# Altium PCB Dual PMT Controller - Light Interlock.PcbDoc
Units mm, origin at the board's own origin, x right, y up, seen from the top; angles counter-clockwise.
Board outline 38 x 30 mm, 4 copper layers (Top Layer, Mid Layer 1, Mid Layer 2, Bottom Layer), stack 1.57 mm thick; 8 components, 5 nets, 45 pads, 6 vias.
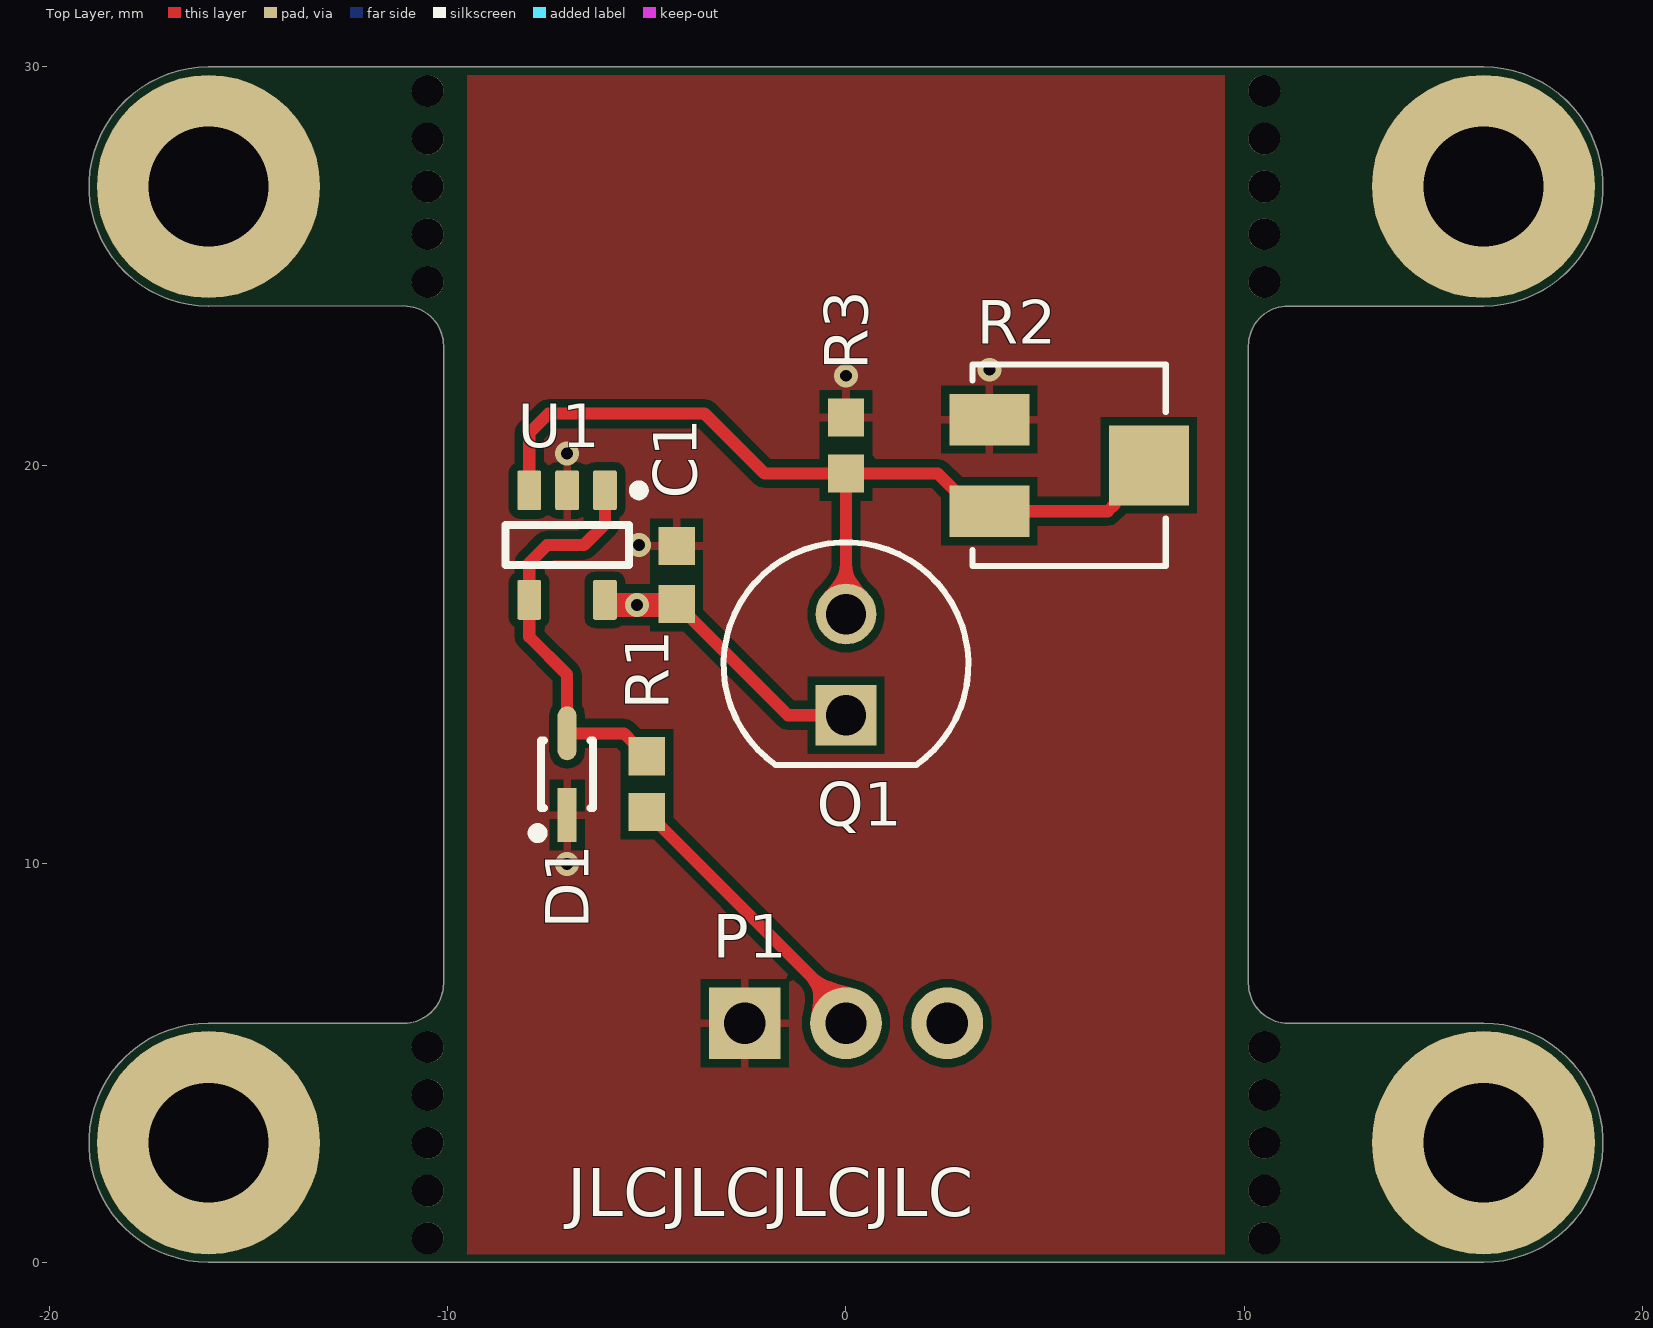
[diagram p0: Top Layer view]
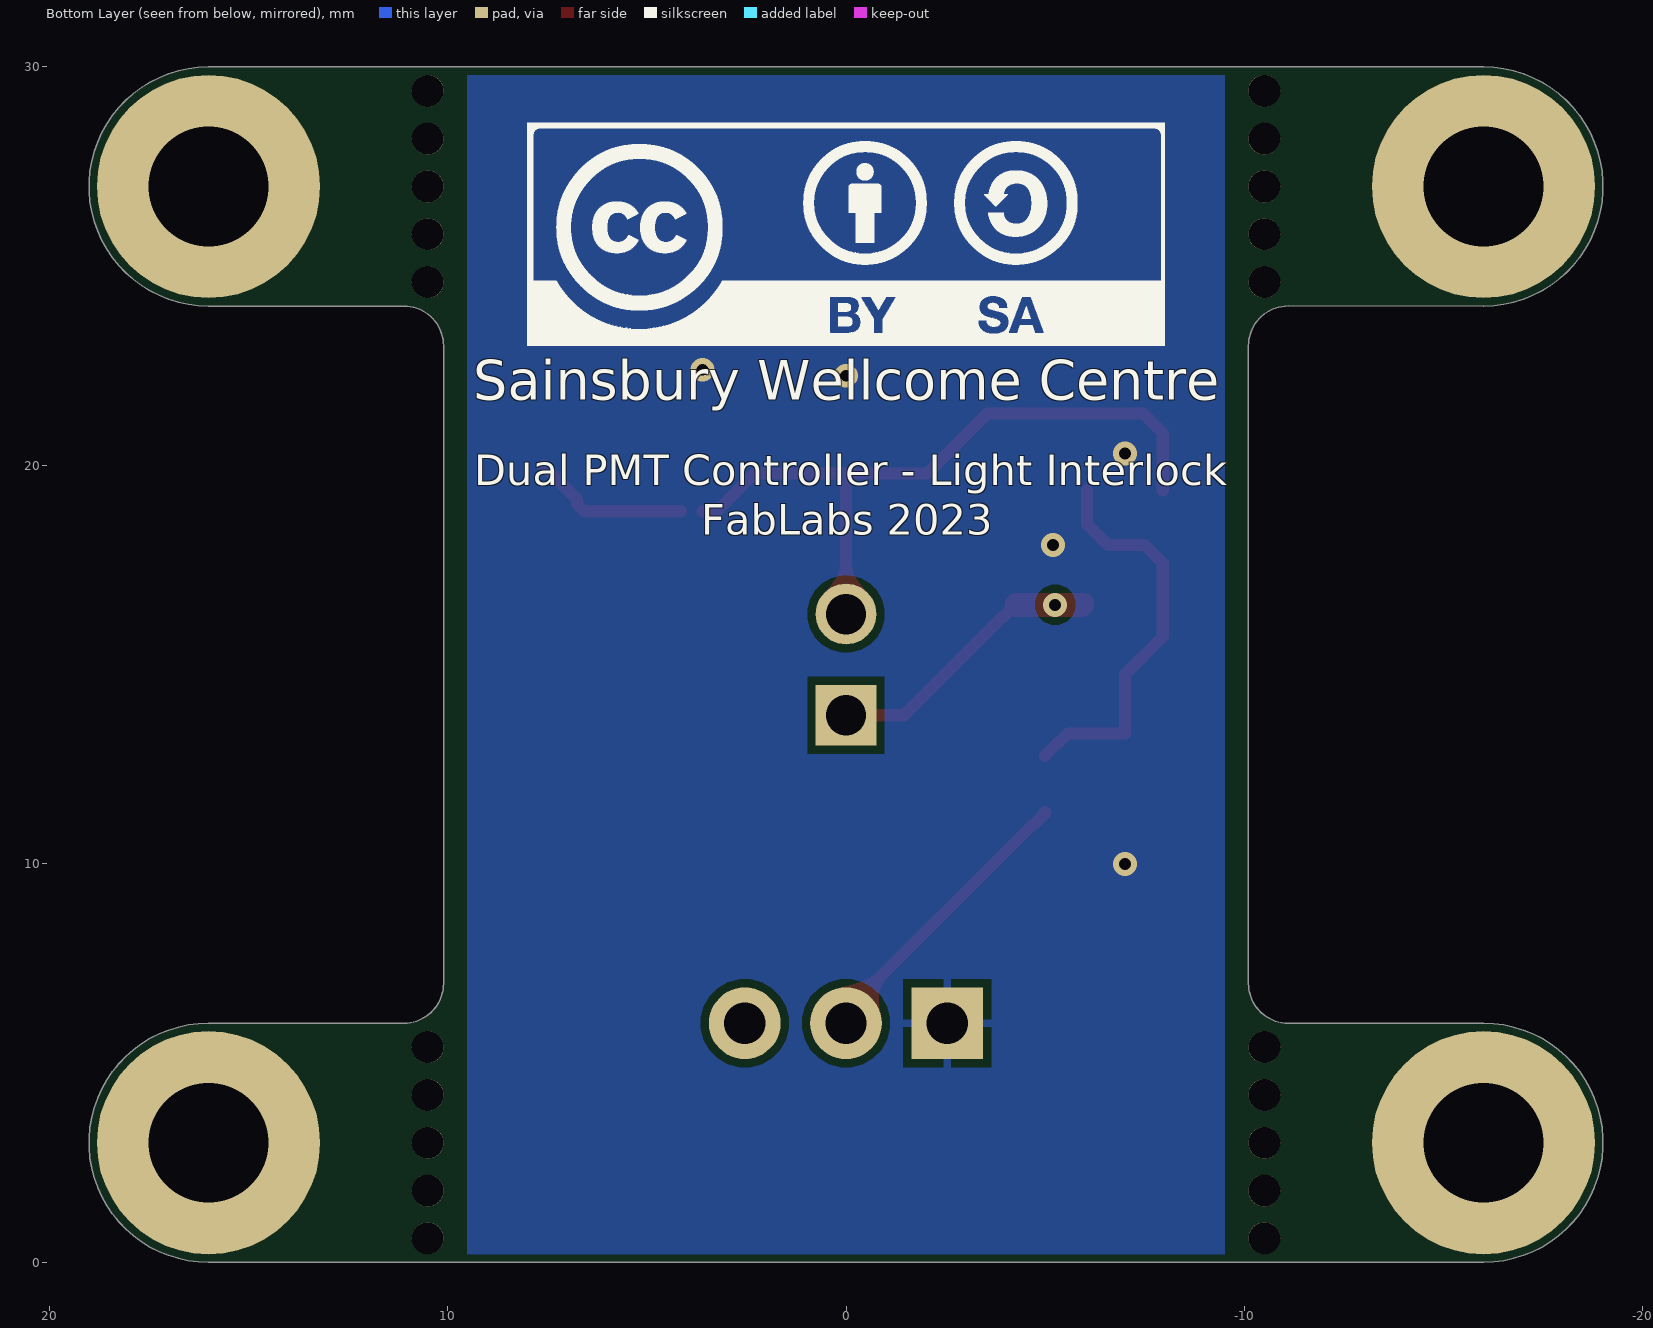
[diagram p1: Bottom Layer view, seen from below]
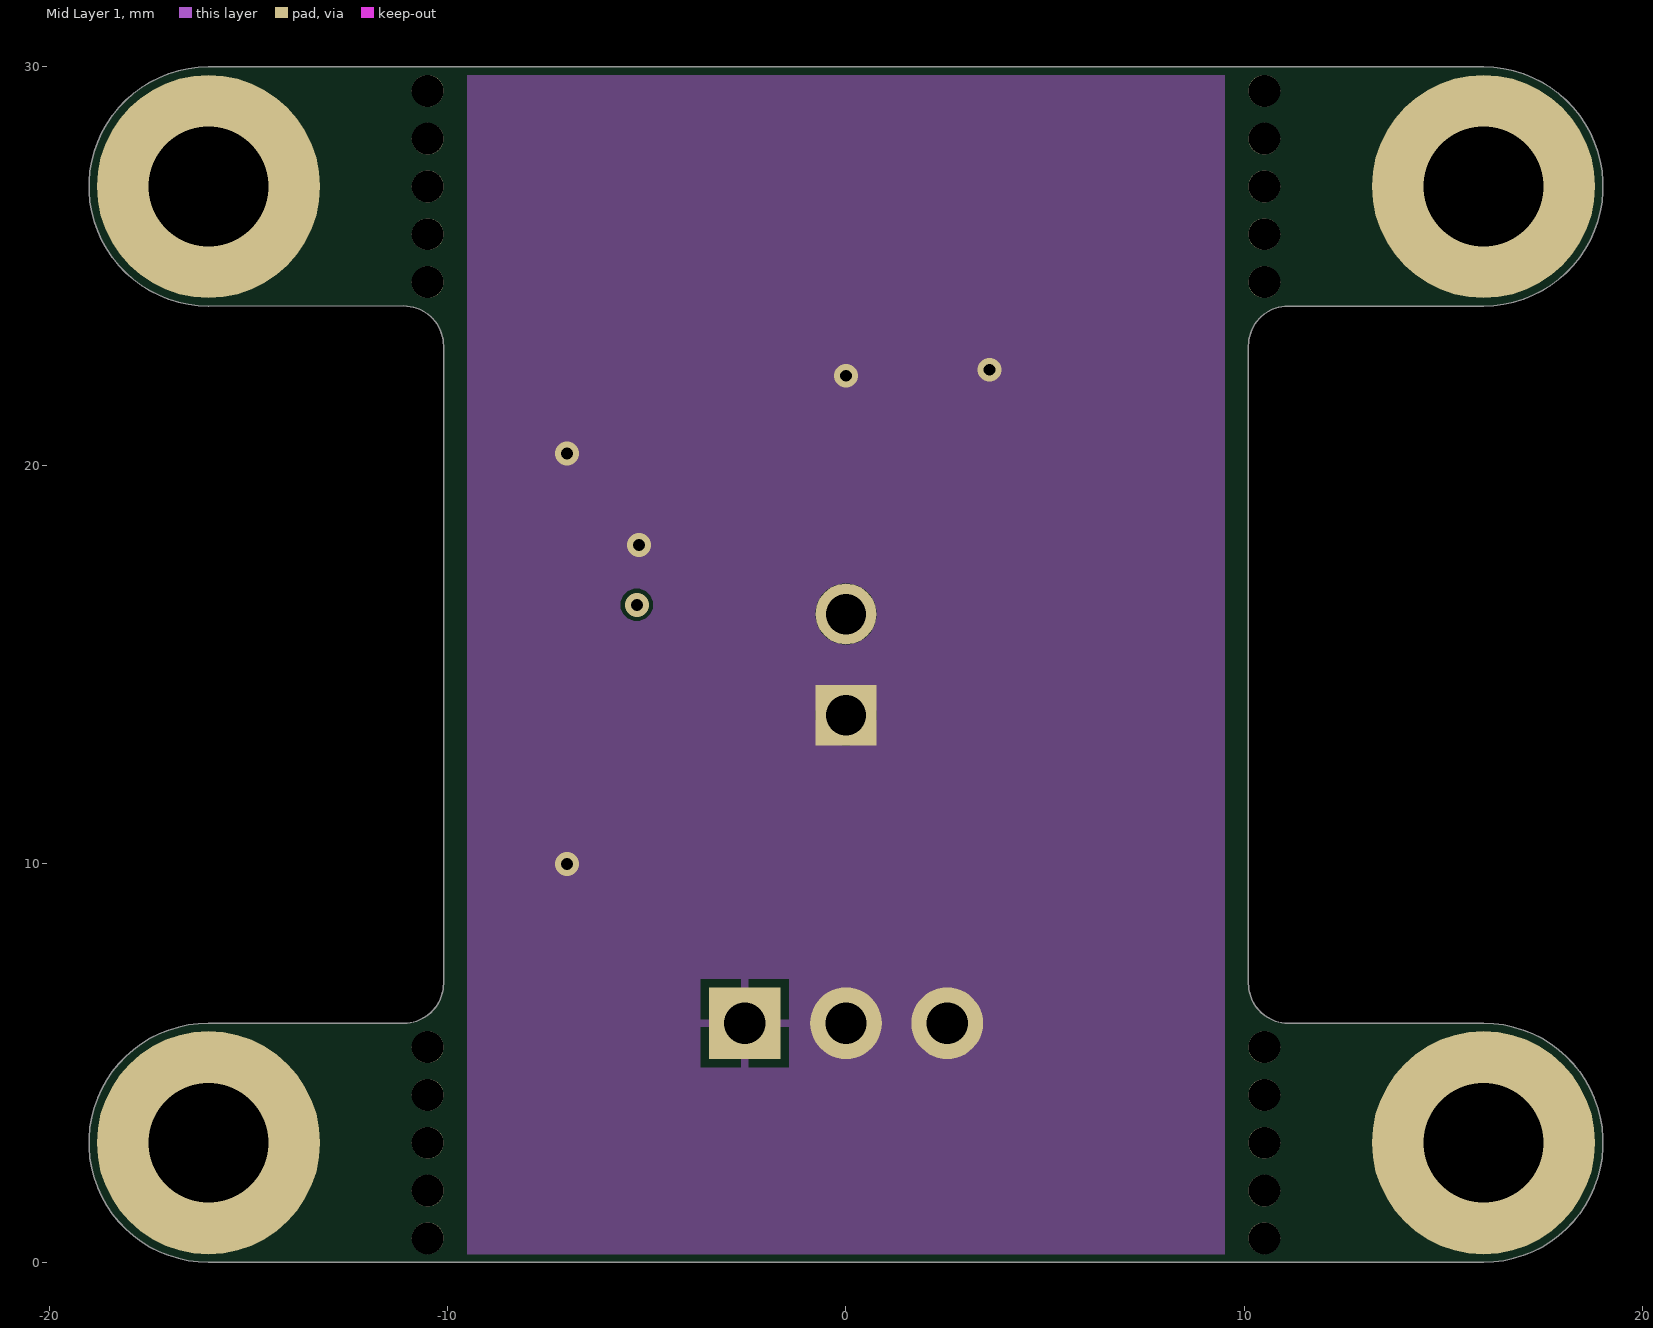
[diagram p2: Mid Layer 1]
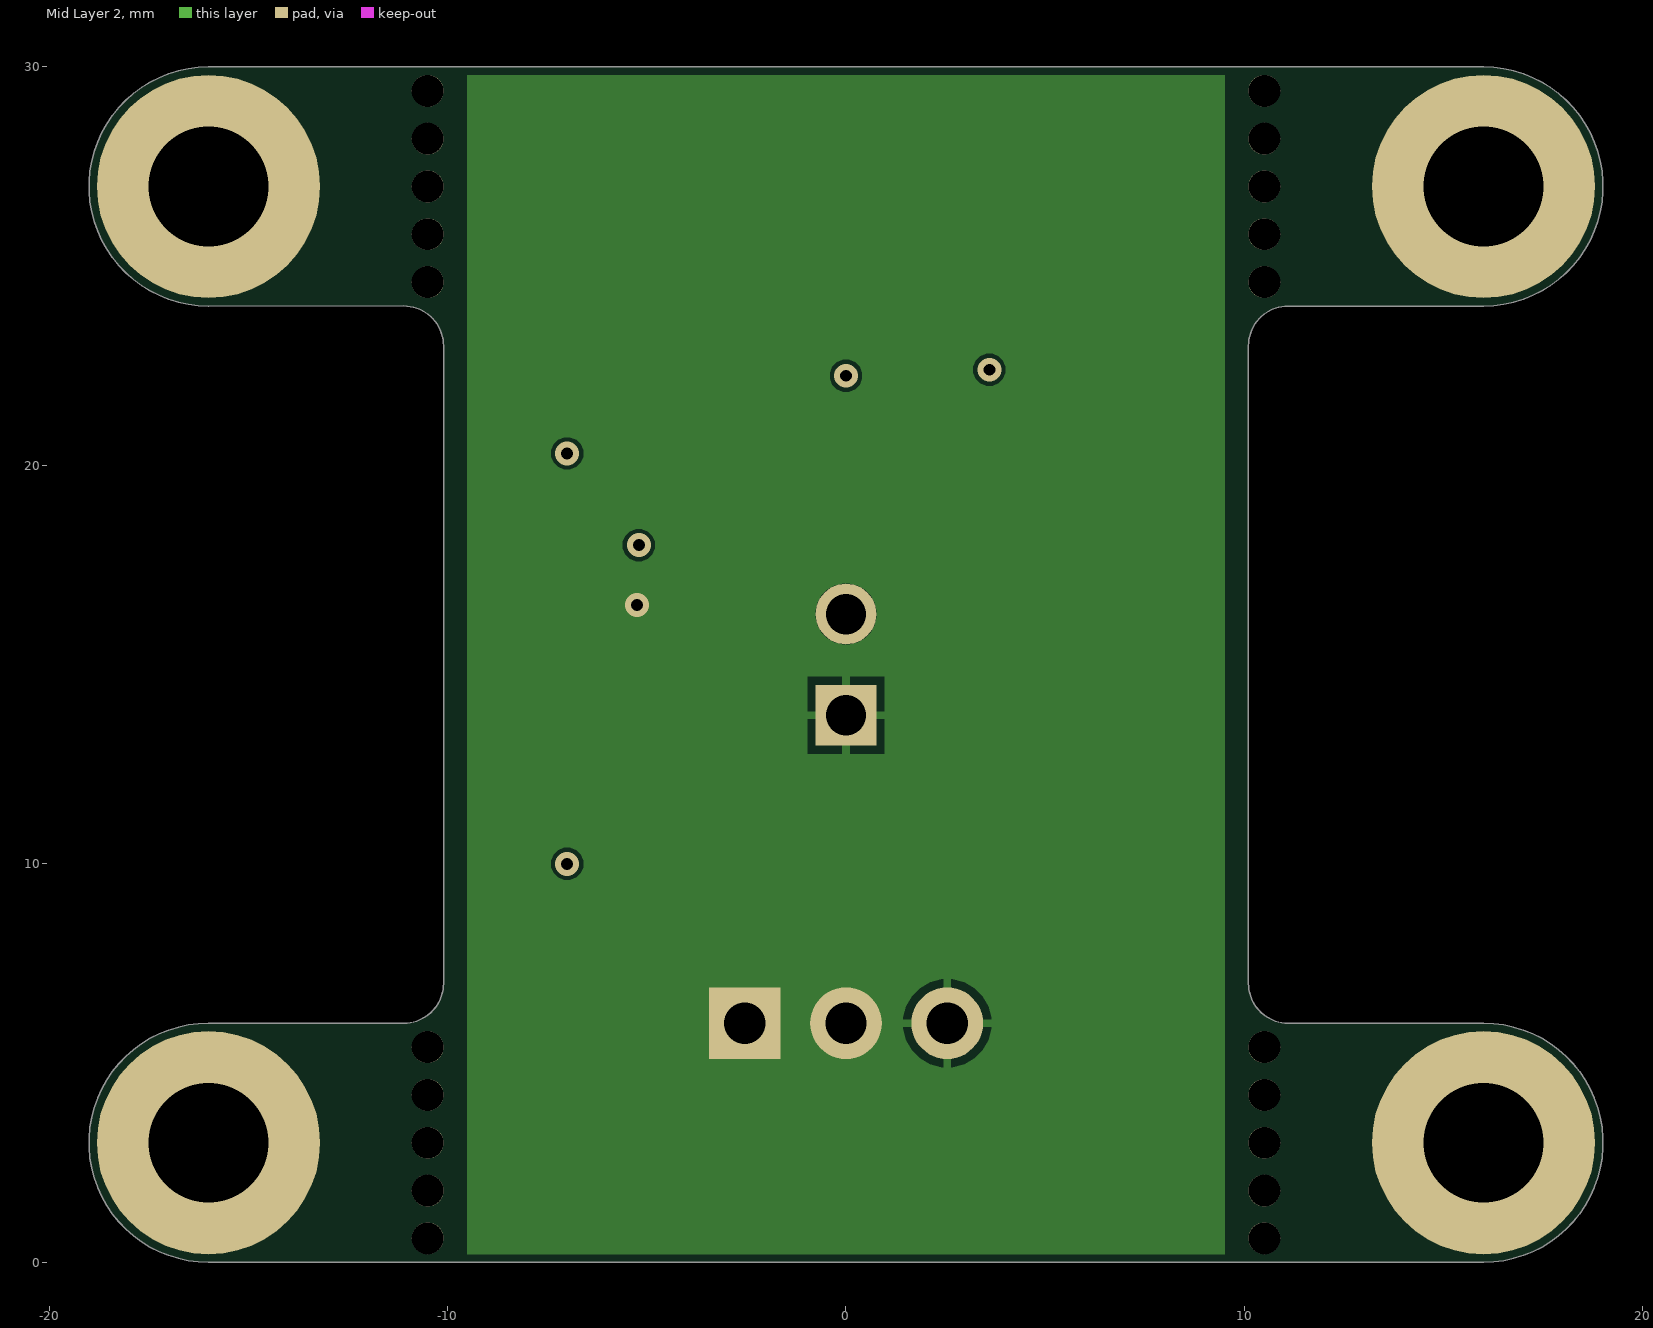
[diagram p3: Mid Layer 2]
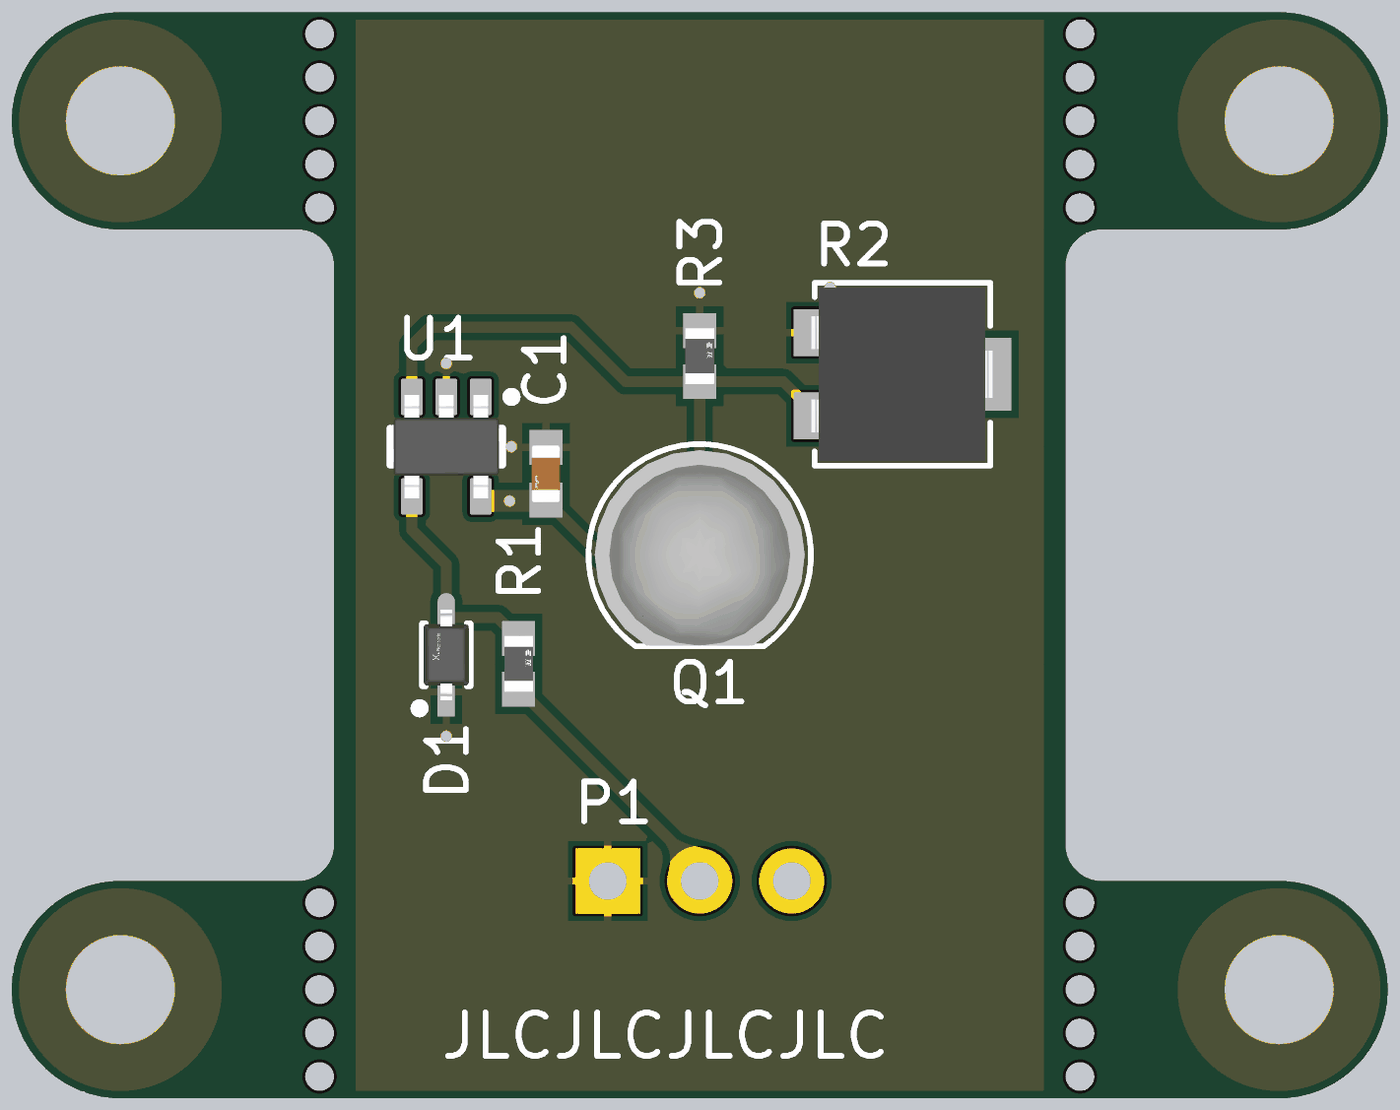
[diagram p4: 3D render of the assembled board from above, using the file's embedded part models]

## Layer stack, top to bottom
Top Solder: solder mask 0.0127, Solder Resist, Dk 3.8
Top Layer: signal copper 0.035
Dielectric 1: prepreg 0.2, 7628, Dk 4.6
Mid Layer 1: signal copper 0.0175
Core: core 1.065, FR-4, Dk 4.5
Mid Layer 2: signal copper 0.0175
Dielectric 2: prepreg 0.2, 7628, Dk 4.6
Bottom Layer: signal copper 0.035
Bottom Solder: solder mask 0.0127, Solder Resist, Dk 3.8

## Board outline
-16,0 12,0 16,0 ccw(c16,3) 16,6 11.1,5.999 cw(c11.1,7) 10.1,7.003 10.1,22.997 cw(c11.1,23) 11.1,24 16,24 ccw(c16,27) 16,30 12,30 -16,30 ccw(c-16,27) -16,24 -11.1,24.001 cw(c-11.1,23) -10.099,22.997 -10.1,7.003 cw(c-11.1,7) -11.1,6 -16,6 ccw(c-16,3)

## Design rules (kind name [scope] priority, off if disabled: settings)
BoardOutlineClearance [All] p1: gap=0.2 ignorepadtopadclearanceinfootprint=FALSE
Clearance [All] p1: gap=0.203 ignorepadtopadclearanceinfootprint=TRUE except(0.127: Arc-Via Track-Via SMDPad-Via THPad-Via Via-Via; 0.25: Arc-Hole Track-Hole SMDPad-Hole THPad-Hole Via-Hole Fill-Hole Poly-Hole Region-Hole Text-Hole)
ComponentClearance [All] p1: gap=0.102 collisioncheckmode=3 verticalgap=0.102 showdistances=TRUE
DiffPairsRouting [All] p1: maxlimit=0.102 minlimit=0.102 mostfreqgap=0.102 toplayer_minwidth=0.102 toplayer_maxwidth=1816.048 toplayer_prefwidth=0.102 midlayer1_minwidth=0.102 midlayer1_maxwidth=1816.048 midlayer1_prefwidth=0.102 midlayer2_minwidth=0.102 midlayer2_maxwidth=1816.048 midlayer2_prefwidth=0.102 bottomlayer_minwidth=0.102 bottomlayer_maxwidth=1816.048 bottomlayer_prefwidth=0.102 maxuncoupledlength=12.7
Height [All] p1: minheight=0 maxheight=1816.048 prefheight=12.7
HoleSize [All] p1: absolutevalues=TRUE maxlimit=6.3 minlimit=0.2 maxpercent=80.000 minpercent=20.000
HoleToHoleClearance [All] p1: gap=0.25 allowstackedmicrovias=FALSE
MinimumAnnularRing [All] p1: minimumring=0.076
MinimumSolderMaskSliver [All] p1: minsoldermaskwidth=0
PlaneClearance [All] p1: clearance=0.203
PlaneConnect PlaneConnectPowerPads [InPadClass('PowerPads')] p1: planeconnectstyle=Direct reliefexpansion=0.508 reliefentries=4 reliefconductorwidth=0.254 reliefairgap=0.254
PlaneConnect [All] p2: pad.planeconnectstyle=Relief pad.reliefexpansion=0.3 pad.reliefentries=4 pad.reliefconductorwidth=0.203 pad.reliefairgap=0.203 via.planeconnectstyle=Direct via.reliefexpansion=0.3 via.reliefentries=4 via.reliefconductorwidth=0.127 via.reliefairgap=0.127
PolygonConnect PolygonConnectPowerPads [All vs (InPadClass('PowerPads'))] p1: connectstyle=Direct reliefconductorwidth=0.254 reliefentries=4 polygonreliefangle="90 Angle" airgapwidth=0.254
PolygonConnect [All] p2: thpad.connectstyle=Relief thpad.reliefconductorwidth=0.203 thpad.reliefentries=4 thpad.polygonreliefangle="90 Angle" thpad.airgapwidth=0.203 smdpad.connectstyle=Relief smdpad.reliefconductorwidth=0.203 smdpad.reliefentries=4 smdpad.polygonreliefangle="90 Angle" smdpad.airgapwidth=0.203 via.connectstyle=Direct via.reliefconductorwidth=0.127 via.reliefentries=4 via.polygonreliefangle="90 Angle" via.airgapwidth=0.127
RoutingVias [All] p1: holewidth=0.2 width=0.45 viastyle="Through Hole" minholewidth=0.2 minwidth=0.45 maxholewidth=6.3 maxwidth=6.55
SilkToSilkClearance [All] p1: silktosilkclearance=0
SilkToSolderMaskClearance [IsPad] p1: minsilkscreentomaskgap=0.102 clearancetoexposedcopper=TRUE
SolderMaskExpansion [All] p1: expansion=0.075 istentingtop=FALSE
Width [All] p1: maxlimit=1816.048 minlimit=0.203 preferedwidth=0.254
20 further rules are at their usual default settings.

## Components (designator, comment, footprint, x,y, rotation, side; value= is the part's Value field where it differs from the comment)
C1 "C0603-100nF-100V-10%-X7R" FP-GRM188-0_1-e0_2_0_5-IPC_B -4.25,17.25 r270 top value=100nF
D1 "PESD5V0S1BA,115" FP-SOD323-CA-IPC_B -7,12.25 r90 top
P1 "Header-103" Header-103 -2.54,6 r0 top
Q1 "TEPT5700" LED_TEPT5700_VIS 0,13.73 r90 top
R1 "R0603-150R-1/16W-0.1%" FP-CPF0603-IPC_B -5,12 r270 top value=150
R2 "SM-42TA504" SM-42TAxxx_NDC 5.6,20 r0 top value=500k
R3 "R0603-240k-1/16W-0.1%" FP-CPF0603-IPC_B 0,20.5 r270 top value=240k
U1 "OPA353NA/250" DBV0005A_N -7,18 r270 top

## Footprints (in the part's own frame and the unit in brackets; to place one, negate y for a bottom-side part, rotate by r counter-clockwise, add the part's x,y. Pads: shape width x height; smd on the part's side, far side on the other; paste and mask are expansions set on the pad)
DBV0005A_N [mm] "SOT23, 5-Leads, Body 3.05x1.75mm, Pitch 0.95mm, IPC Medium Density"
  rrect17% 1x0.6 smd: 1(-1.375,0.95) 2(-1.375,0) 3(-1.375,-0.95) 4(1.375,-0.95) 5(1.375,0.95)
  silkscreen extent -1.5,-1.55 0.5,1.93, body extent -1.42,-1.46 1.42,1.46, height 1.08
FP-CPF0603-IPC_B [mm]
  rect 0.958x0.912 smd paste+0 mask+0: 1(-0.702,0) 2(0.702,0)
  body extent -1.43,-0.71 1.43,0.71, height 0.25
FP-GRM188-0_1-e0_2_0_5-IPC_B [mm]
  rect 0.959x0.912 smd paste+0 mask+0: 1(-0.727,0) 2(0.727,0)
  body extent -1.46,-0.71 1.46,0.71, height 0.25
FP-SOD323-CA-IPC_B [mm]
  rect 1.355x0.476 smd paste+0 mask+0: 1(-1.025,0)
  rrect100% 1.355x0.476 smd paste+0 mask+0: 2(1.025,0)
  silkscreen extent -1.6,-0.65 0.85,0.86, body extent -1.95,-0.87 1.95,0.87, height 0.25
Header-103 [mm]
  rect 1.8x1.8 hole 1.04: 1(0,0)
  round 1.8 hole 1.04: 2(2.54,0) 3(5.08,0)
LED_TEPT5700_VIS [mil] "VISHAY - Leaded T-1 3/4 - 5mm"
  rect 60x60 hole 40: 1(0,0)
  round 60 hole 40: 2(100,0)
  silkscreen extent -49,-121 171,121, body extent -48,-114 164,114, height 457
SM-42TAxxx_NDC [mil] "Trimpot, Multi Turn, RuO2 Cermet, Side Adjust, Surface Mount, 11 Turns"
  rect 79x51 smd: 1(-78.74,-45.28) 3(-78.74,45.28)
  rect 79x79 smd paste+0 mask+0: 2(78.74,0)
  silkscreen extent -96,-100 96,100, body extent -99,-94 98,94, height 146

## Part data
C1: library part CMP-611-0027-19, "0.1µF ±10% 100V Ceramic Capacitor X7R 0603 (1608 Metric)", Capacitance=100nF, Capacitor Type=Ceramic, Case Code (Imperial)=0603, Case Code (Metric)=1608, Dielectric=X7R, Max Operating Temperature=125°C, Min Operating Temperature=-55°C, Package Quantity=1, Tolerance=10%, Voltage=100V, Case/Package=0603, Construction=Flat, Depth=0.8mm, Height=0.8mm, Lead Free="Lead Free", Length=1.6mm, Material=Ceramic, Mount="Surface Mount", Packaging="Tape and Reel", Pick&PlaceFootprint=0603_CAP, Radiation Hardening=No, REACH SVHC="No SVHC", RoHS=Yes, RoHS Compliant=Yes, Series=GRM, Size=0.8mm, Termination=SMD/SMT, Thickness=0.035inch, Voltage Rating=100V, Voltage Rating (DC)=100V, Weight=0.000222oz, Width=0.8mm
D1: library part CMP-820-0001-1, "Trans Voltage Suppressor Diode, 130W, 5V V(RWM), Bidirectional, 1 Element, Silicon", Max Breakdown Voltage=9.5V, Max Operating Temperature=150°C, Min Breakdown Voltage=5.5V, Non-rep Peak Rev Power Dis-Max=130W, Package Body Material=Plastic, Package Shape=Rectangular, Package Style="SMALL OUTLINEMeter", Peak Reflow Temperature (Cel)=260°C, Rep Pk Reverse Voltage-Max=5V, Time @ Peak Reflow Temperature-Max (s)=30s, Diode Element Material=SILICON, Diode Type="TRANS VOLTAGE SUPPRESSOR", JESD-30 Code=R-PDSO-G2, JESD-609 Code=e3, Moisture Sensitivity Level=1, Mount="Surface Mount", Number of Elements=1, Number of Pins=2, PartNumber=PESD5V0S1BA,115, Pick&PlaceFootprint=SOD323, Polarity=Bidirectional, REACH SVHC=Yes, Reference Standard=IEC-60134, RoHS Compliant=Yes, Surface Mount=Yes, Technology=AVALANCHE, Terminal Finish=Tin, Terminal Form="Gull Wing", Terminal Position=DUAL
P1: library part CMP-370-0045-1, "0.1\" spaced holes to solder wires into", Mount="Surface Mount", PartNumber=Header-103, Pitch="0.1\""
Q1: library part CMP-540-0000-1, "Ambient Light Sensor Phototransistor Chip Silicon 570nm 2-Pin T-1 3/4", Case/Package=Radial, Collector Emitter Breakdown Voltage=6V, Dark Current=50nA, Max Collector Current=20mA, Max Operating Temperature=85°C, Max Power Dissipation=100mW, Min Operating Temperature=-40°C, Operating Supply Voltage=5V, Package Quantity=4000, Collector Emitter Voltage (VCEO)=6V, Height=5mm, Lead Free="Lead Free", Length=5.7mm, Lens Style=Flat, Mount="Through Hole", Number of Channels=1, Number of Elements=1, Number of Pins=2, Output Type=Analog, Packaging=Bulk, Polarity=NPN, Power Consumption=100mW, Power Dissipation=100mW, Radiation Hardening=No, REACH SVHC=Unknown, RoHS Compliant=Yes, Series=-, Viewing Angle=50°, Wavelength=570nm, Width=5.7mm
R1: library part CMP-633-0078-2, "Surface Mount Resistor 150 Ohm 1/16 W 0.1% 0603 (1608 Metric)", Case Code (Imperial)=0603, Case Code (Metric)=1608, Max Operating Temperature=155°C, Max Power Dissipation="62.5 mW", Min Operating Temperature=-55°C, Number of Resistors=1, Power Rating=62.5mW, Resistance=150, Resistance Tolerance=0.1%, Resistor Type="FIXED RESISTOR", Temperature Coefficient=25ppm/°C, Voltage Rating=50V, Case/Package=0603, Composition="Thin Film", Construction=Chip, ELV=Compliant, Height=0.45mm, Length=1.6mm, Mount="Surface Mount", Number of Pins=2, Number of Terminations=2, Packaging="Tape and Reel", Pick&PlaceFootprint=R0603, REACH SVHC=Yes, RoHS=Yes, RoHS Compliant=Yes, Series=CPF, Size Code=0603, Technology="THIN FILM", Termination=Wraparound, Tolerance=0.1%, Voltage Rating (DC)=50V, Weight=7.1E-05oz, Width=0.8mm
R2: library part CMP-632-0001-2, "Trimmer, Cermet, 0.25W, 500k ohm, 300V, 10% +/-Tol, 100ppm/Cel, 11 Turn(s), 1918", Case/Package=SM-42TA, Power Rating=250mW, Resistance=500k, Tolerance=10%, Voltage Rating=300V, Mount=SMD, Number of Turns=11, PartNumber=SM-42TA504, Pick&PlaceFootprint=SM-42TA, RoHS=Yes
R3: library part CMP-633-0073-14, "Surface Mount Resistor 240k Ohm 1/16 W 0.1% 0603 (1608 Metric)", Case Code (Imperial)=0603, Case Code (Metric)=1608, Max Operating Temperature=155°C, Max Power Dissipation="62.5 mW", Min Operating Temperature=-55°C, Number of Resistors=1, Power Rating=62.5mW, Resistance=240k, Resistance Tolerance=0.1%, Resistor Type="Thin Film", Temperature Coefficient=25ppm/°C, Voltage Rating=50V, Case/Package=0603, Composition="Thin Film", ELV=Compliant, Height=0.45mm, Length=1.6mm, Mount="Surface Mount", Number of Pins=2, Number of Terminations=2, Packaging="Tape and Reel", Pick&PlaceFootprint=R0603, REACH SVHC="No SVHC", RoHS=Yes, RoHS Compliant=Yes, Series=CPF, Size Code=0603, Technology="Thin Film", Termination=Solder, Tolerance=0.1%, Voltage Rating (DC)=50V, Weight=7.1E-05oz, Width=0.8mm
U1: library part CMP-941-0005-3, "Operational Amplifier, 1 Func, 8000uV Offset-Max, CMOS, PDSO5", Component Name=OPA353NA/250, PartNumber=OPA353NA/250, Pick&PlaceFootprint=SOT-23-5

## Free pads (board coordinates)
  round 5.6 hole 3 mask-1.524: 1(-16,3) 1(-16,27) 1(16,3) 1(16,27)
  round 0.8 hole 0.8 unplated: 2(-10.5,5.4) 2(-10.5,24.6) 2(10.5,5.4) 2(10.5,24.6) 3(-10.5,4.2) 3(-10.5,25.8) 3(10.5,4.2) 3(10.5,25.8) 4(-10.5,3) 4(-10.5,27) 4(10.5,3) 4(10.5,27) 5(-10.5,1.8) 5(-10.5,28.2) 5(10.5,1.8) 5(10.5,28.2) 6(-10.5,0.6) 6(-10.5,29.4) 6(10.5,0.6) 6(10.5,29.4)

## Via types
v1: diameter 0.6, hole 0.3, Top Layer to Bottom Layer, tented both sides, 6 vias

## Nets (pads, with @x,y where several pads share a name; then routed paths per layer and width w, separated by ;. In a path a pad name is that pad's centre, name@x,y a point inside that pad or via, vN(x,y) a via of type N, cw(c..) or ccw(c..) an arc to the next point about the centre after c; other vN are vias at no path point)
3V3: C1.2 P1.3 Q1.1 U1.5 | length 7.3
  Top Layer w0.305: U1.5 U1.5@-5.925,16.5 ; C1.2@-4.273,16.5 C1.2 -4.25,16.5 -3.946,16.196 -3.923,16.196 -1.457,13.73 Q1.1
  Top Layer w0.6: U1.5@-5.925,16.5 v1(-5.25,16.5) C1.2@-4.273,16.5
GND: C1.1 D1.1 P1.1 R2.3 R3.1 U1.2
  other v1: -7,10 -5.2,18 -7,20.3 0,22.25 3.6,22.4
NetD1_2: D1.2 R1.1 U1.1 U1.4 | length 10.1
  Top Layer w0.305: U1.1 -6.05,18.525 -6.575,18 -7.5,18 -7.95,17.55 -7.95,15.7 -7,14.75 D1.2 -5.573,13.275 -5.327,13.029 -5.304,13.029 -5,12.725 R1.1
NetP1_2: P1.2 R1.2 | length 7.4
  Top Layer w0.305: R1.2 -5,11.275 -4.696,10.971 -4.673,10.971 0,6.298 P1.2
NetQ1_2: Q1.2 R2.1 R2.2 R3.2 U1.3 | length 21.7
  Top Layer w0.305: U1.3 -7.95,20.812 -7.462,21.3 -3.55,21.3 -2.048,19.798 R3.2 ; Q1.2 R3.2 ; R2.1 3.244,18.85 2.749,19.345 2.749,19.351 2.302,19.798 R3.2 ; R2.1@4.144,18.85 4.5,18.85 6.571,18.85 6.749,19.029 6.749,19.149 R2.2

## Polygon pours and split planes (outlines as drawn)
GND on Top Layer "GND_L01_P000" (solid, pour order 0): -9.5,0 9.5,0 9.5,30 -9.5,30
GND on Mid Layer 1 "GND_L02_P001" (solid, pour order 1): -9.5,0 9.5,0 9.5,30 -9.5,30
3V3 on Mid Layer 2 "3V3_L03_P002" (solid, pour order 2): -9.5,0 9.5,0 9.5,30 -9.5,30
GND on Bottom Layer "GND_L04_P003" (solid, pour order 3): -9.5,0 9.5,0 9.5,30 -9.5,30

## Silkscreen, mask and mechanical layers (free items; w line width, h text height)
Top Overlay:
  text "JLCJLCJLCJLC" at -6.998,1.16 h1.2
Bottom Overlay:
  drawing of 12 lines, arcs and shapes, not listed
  text "Sainsbury Wellcome Centre" at 9.354,21.321 h1.7
  text "Dual PMT Controller - Light Interlock" at 9.334,19.245 h1.3
  text "FabLabs 2023" at 3.634,18.014 h1.3
Mechanical 1:
  lines w0.1: -16,0 cw(c-16,3) -16,6 -11.1,5.999 ccw(c-11.1,7) -10.1,7.003 -10.099,22.997 ccw(c-11.1,23) -11.1,24 -16,24 cw(c-16,27) -16,30 -12,30 12,30 16,30 cw(c16,27) 16,24 11.1,24.001 ccw(c11.1,23) 10.1,22.997 10.1,7.003 ccw(c11.1,7) 11.1,6 16,6 cw(c16,3) 16,0 12,0 -12,0 -16,0
Layer Stackup:
  drawing of 295 lines, arcs and shapes, not listed
  text "Layer" at 1.968,66.48 h1.52
  text "Name" at 12.38,66.48 h1.52
  text "Material" at 35.996,66.48 h1.52
  text "Thickness" at 57.834,66.48 h1.52
  text "Constant" at 74.34,66.48 h1.52
  text "Board Layer Stack" at 88.814,66.48 h1.52
  text "Top Overlay" at 12.38,63.432 h1.52
  text "Top Solder" at 12.38,60.384 h1.52
  text "Solder Resist" at 35.996,60.384 h1.52
  text "0.013mm" at 57.834,60.384 h1.52
  text "3.8" at 74.34,60.384 h1.52
  text "1" at 1.968,57.336 h1.52
  text "Top Layer" at 12.38,57.336 h1.52
  text "0.035mm" at 57.834,57.336 h1.52
  text "Dielectric 1" at 12.38,54.288 h1.52
  text "7628" at 35.996,54.288 h1.52
  text "0.200mm" at 57.834,54.288 h1.52
  text "4.6" at 74.34,54.288 h1.52
  text "2" at 1.968,51.24 h1.52
  text "Mid Layer 1" at 12.38,51.24 h1.52
  text "0.018mm" at 57.834,51.24 h1.52
  text "Core" at 12.38,48.192 h1.52
  text "FR-4" at 35.996,48.192 h1.52
  text "1.065mm" at 57.834,48.192 h1.52
  text "4.5" at 74.34,48.192 h1.52
  text "3" at 1.968,45.144 h1.52
  text "Mid Layer 2" at 12.38,45.144 h1.52
  text "0.018mm" at 57.834,45.144 h1.52
  text "Dielectric 2" at 12.38,42.096 h1.52
  text "7628" at 35.996,42.096 h1.52
  text "0.200mm" at 57.834,42.096 h1.52
  text "4.6" at 74.34,42.096 h1.52
  text "4" at 1.968,39.048 h1.52
  text "Bottom Layer" at 12.38,39.048 h1.52
  text "0.035mm" at 57.834,39.048 h1.52
  text "Bottom Solder" at 12.38,36 h1.52
  text "Solder Resist" at 35.996,36 h1.52
  text "0.013mm" at 57.834,36 h1.52
  text "3.8" at 74.34,36 h1.52
  text "Bottom Overlay" at 12.38,32.952 h1.52
Drill Drawing:
  circle w0.254: c32.556,9.8 r0.847
  lines w0.254: 31.709,5.144 32.556,5.567 33.403,5.144 32.979,5.99 33.403,6.837 32.556,6.413 31.709,6.837 32.133,5.99 31.709,5.144 ; 31.709,13.187 32.133,13.187 32.556,12.764 32.979,13.187 33.403,13.187 32.979,13.61 33.403,14.033 32.979,14.033 32.556,14.457 32.133,14.033 31.709,14.033 32.133,13.61 31.709,13.187 ; 31.709,18.267 33.403,18.267 32.556,16.574 31.709,18.267 ; 31.709,20.384 33.403,20.384 33.403,22.077 31.709,22.077 31.709,20.384
  lines w0.381: 30.191,4.001 315.708,4.001 ; 30.191,23.051 315.708,23.051 ; 44.183,0.191 44.183,26.86 ; 57.895,0.191 57.895,26.86 ; 86.335,0.191 86.335,26.86 ; 99.184,0.191 99.184,26.86 ; 117.823,0.191 117.823,26.86 ; 155.911,0.191 155.911,26.86 ; 170.893,0.191 170.893,26.86 ; 189.837,0.191 189.837,26.86 ; 225.132,0.191 225.132,26.86 ; 246.818,0.191 246.818,26.86 ; 280.691,0.191 280.691,26.86 ; 30.191,0.191 315.708,0.191 315.708,26.86 30.191,26.86 30.191,0.191
  text "Symbol" at 32.477,24.194 h1.83
  text "Count" at 45.326,24.194 h1.83
  text "Hole Size" at 59.038,24.194 h1.83
  text "Plated" at 87.478,24.194 h1.83
  text "Hole Type" at 100.327,24.194 h1.83
  text "Drill Layer Pair" at 118.966,24.194 h1.83
  text "Via/Pad" at 157.054,24.194 h1.83
  text "Pad Shape" at 172.036,24.194 h1.83
  text "Template" at 190.98,24.194 h1.83
  text "Description" at 226.275,24.194 h1.83
  text "Hole Tolerance (+)" at 247.961,24.194 h1.83
  text "Hole Tolerance (-)" at 281.834,24.194 h1.83
  text "2" at 45.326,20.384 h1.52
  text "1.016mm (40.00mil)" at 59.038,20.384 h1.52
  text "PTH" at 87.478,20.384 h1.52
  text "Round" at 100.327,20.384 h1.52
  text "Top Layer - Bottom Layer" at 118.966,20.384 h1.52
  text "Pad" at 157.054,20.384 h1.52
  text "(Mixed)" at 172.036,20.384 h1.52
  text "(Mixed)" at 190.98,20.384 h1.52
  text "3" at 45.326,16.574 h1.52
  text "1.040mm (40.95mil)" at 59.038,16.574 h1.52
  text "PTH" at 87.478,16.574 h1.52
  text "Round" at 100.327,16.574 h1.52
  text "Top Layer - Bottom Layer" at 118.966,16.574 h1.52
  text "Pad" at 157.054,16.574 h1.52
  text "(Mixed)" at 172.036,16.574 h1.52
  text "(Mixed)" at 190.98,16.574 h1.52
  text "4" at 45.326,12.764 h1.52
  text "3.000mm (118.11mil)" at 59.038,12.764 h1.52
  text "PTH" at 87.478,12.764 h1.52
  text "Round" at 100.327,12.764 h1.52
  text "Top Layer - Bottom Layer" at 118.966,12.764 h1.52
  text "Pad" at 157.054,12.764 h1.52
  text "Rounded" at 172.036,12.764 h1.52
  text "c560h300m408" at 190.98,12.764 h1.52
  text "6" at 45.326,8.954 h1.52
  text "0.300mm (11.81mil)" at 59.038,8.954 h1.52
  text "PTH" at 87.478,8.954 h1.52
  text "Round" at 100.327,8.954 h1.52
  text "Top Layer - Bottom Layer" at 118.966,8.954 h1.52
  text "Via" at 157.054,8.954 h1.52
  text "Rounded" at 172.036,8.954 h1.52
  text "v60h30m0mx0_2670034071" at 190.98,8.954 h1.52
  text "20" at 45.326,5.144 h1.52
  text "0.800mm (31.50mil)" at 59.038,5.144 h1.52
  text "NPTH" at 87.478,5.144 h1.52
  text "Round" at 100.327,5.144 h1.52
  text "Top Layer - Bottom Layer" at 118.966,5.144 h1.52
  text "Pad" at 157.054,5.144 h1.52
  text "Rounded" at 172.036,5.144 h1.52
  text "c80hn80" at 190.98,5.144 h1.52
  text "35 Total" at 45.326,1.333 h1.52